# EAGLE board AD5293-adapter (EAGLE 7.3.0)
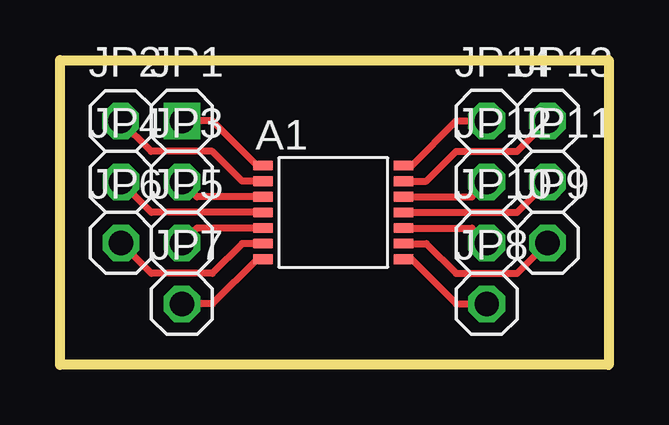
[diagram p0: board, top side]

Size 22.86 x 12.7 mm. Coordinates in mm from the lower left corner, seen from the top.
Outline: 0,12.7 22.86,12.7 22.86,0 0,0 0,12.7
Copper layers (1*16): Top 0.035mm / dielectric 1.5mm / Bottom 0.035mm
Design rules "default": minimum track width 10mil, minimum drill 24mil, track to track 8mil, track to pad 8mil, pad to pad 8mil, via to via 8mil, smd to smd 8mil, copper to edge 40mil, drill to drill 8mil, minimum pad ring 10mil, minimum via ring 8mil, stop-mask expansion 4mil, vias tented up to drill 0mil, thermal gap 10mil

## Footprints (pad centres in the part's own frame; a part is rotated, then mirrored left to right if it is on the bottom)
AD5293 = smd 0.813 x 0.406: 1 -1.95,1.95; 2 -1.95,1.3; 3 -1.95,0.65; 4 -1.95,0; 5 -1.95,-0.65; 6 -1.95,-1.3; 7 -1.95,-1.95; 8 3.9,-1.95; 9 3.9,-1.3; 10 3.9,-0.65; 11 3.9,0; 12 3.9,0.65; 13 3.9,1.3; 14 3.9,1.95
1X01-SQUARE = drill 1.016 square: 1 0,0
1X01 = drill 1.016 octagon: 1 0,0

## Placement (x,y rotation side)
A1  AD5293  [AD5293]  10.41,6.35 0 top
JP1  [1X01-SQUARE]  5.08,10.16 0 top
JP2  [1X01]  2.53,10.16 0 top
JP3  [1X01]  5.08,7.62 0 top
JP4  [1X01]  2.54,7.62 0 top
JP5  [1X01]  5.08,5.08 0 top
JP6  [1X01]  2.54,5.08 0 top
JP7  [1X01]  5.08,2.54 0 top
JP8  [1X01]  17.78,2.54 0 top
JP9  [1X01]  20.32,5.08 0 top
JP10  [1X01]  17.78,5.08 0 top
JP11  [1X01]  20.32,7.62 0 top
JP12  [1X01]  17.78,7.62 0 top
JP13  [1X01]  20.32,10.16 0 top
JP14  [1X01]  17.78,10.16 0 top

## Library data of the parts
A1 = Marcell
JP1-JP14 = pinhead

## Nets
N$2: A1.1 JP1.1
N$3: A1.2 JP2.1
N$4: A1.3 JP3.1
N$5: A1.4 JP4.1
N$6: A1.5 JP5.1
N$7: A1.7 JP7.1
N$8: A1.8 JP8.1
N$9: A1.9 JP9.1
N$10: A1.10 JP10.1
N$11: A1.11 JP11.1
N$12: A1.12 JP12.1
N$13: A1.13 JP13.1
N$14: A1.14 JP14.1
N$15: A1.6 JP6.1

## Tracks (layer width: path | path; a pad name or v marks a point on that pad's centre or on a via)
N$2
  Top 0.3: A1.1 8.21,8.3 6.35,10.16 JP1.1
N$3
  Top 0.3: A1.2 7.59,7.65 6.35,8.89 3.8,8.89 JP2.1
N$4
  Top 0.3: A1.3 5.7,7 JP3.1
N$5
  Top 0.3: A1.4 3.81,6.35 JP4.1
N$6
  Top 0.3: A1.5 5.7,5.7 JP5.1
N$7
  Top 0.15: A1.7 8.21,4.4
  Top 0.3: 8.21,4.4 6.35,2.54 JP7.1
N$8
  Top 0.15: A1.8 14.65,4.4
  Top 0.3: 14.65,4.4 16.51,2.54 JP8.1
N$9
  Top 0.3: A1.9 15.27,5.05 16.51,3.81 19.05,3.81 JP9.1
N$10
  Top 0.3: A1.10 17.16,5.7 JP10.1
N$11
  Top 0.3: A1.11 19.05,6.35 JP11.1
N$12
  Top 0.3: A1.12 17.16,7 JP12.1
N$13
  Top 0.3: A1.13 15.27,7.65 16.51,8.89 19.05,8.89 JP13.1
N$14
  Top 0.15: A1.14 14.65,8.3
  Top 0.3: 14.65,8.3 16.51,10.16 JP14.1
N$15
  Top 0.3: A1.6 7.59,5.05 6.35,3.81 3.81,3.81 JP6.1